# Altium PCB Crosstalk-1.PcbDoc
Units mil, origin at the board's own origin, x right, y up, seen from the top; angles counter-clockwise.
Board outline 3200 x 1570 mil, 2 copper layers (Top Layer, Bottom Layer); 9 components, 4 nets, 18 pads, 6 vias.
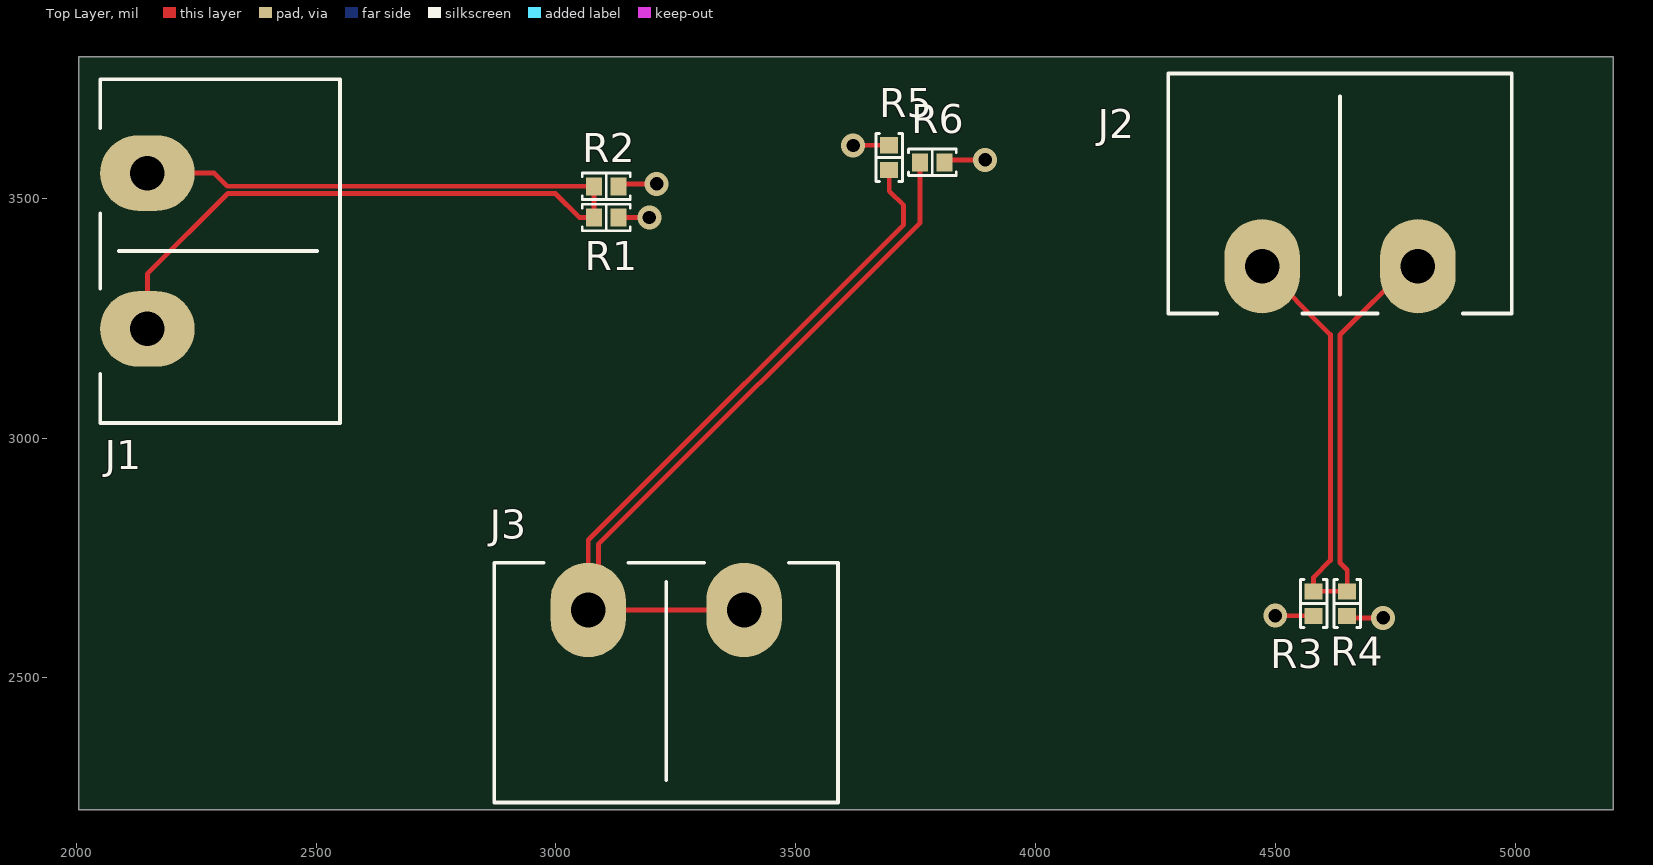
[diagram p0: Top Layer view]
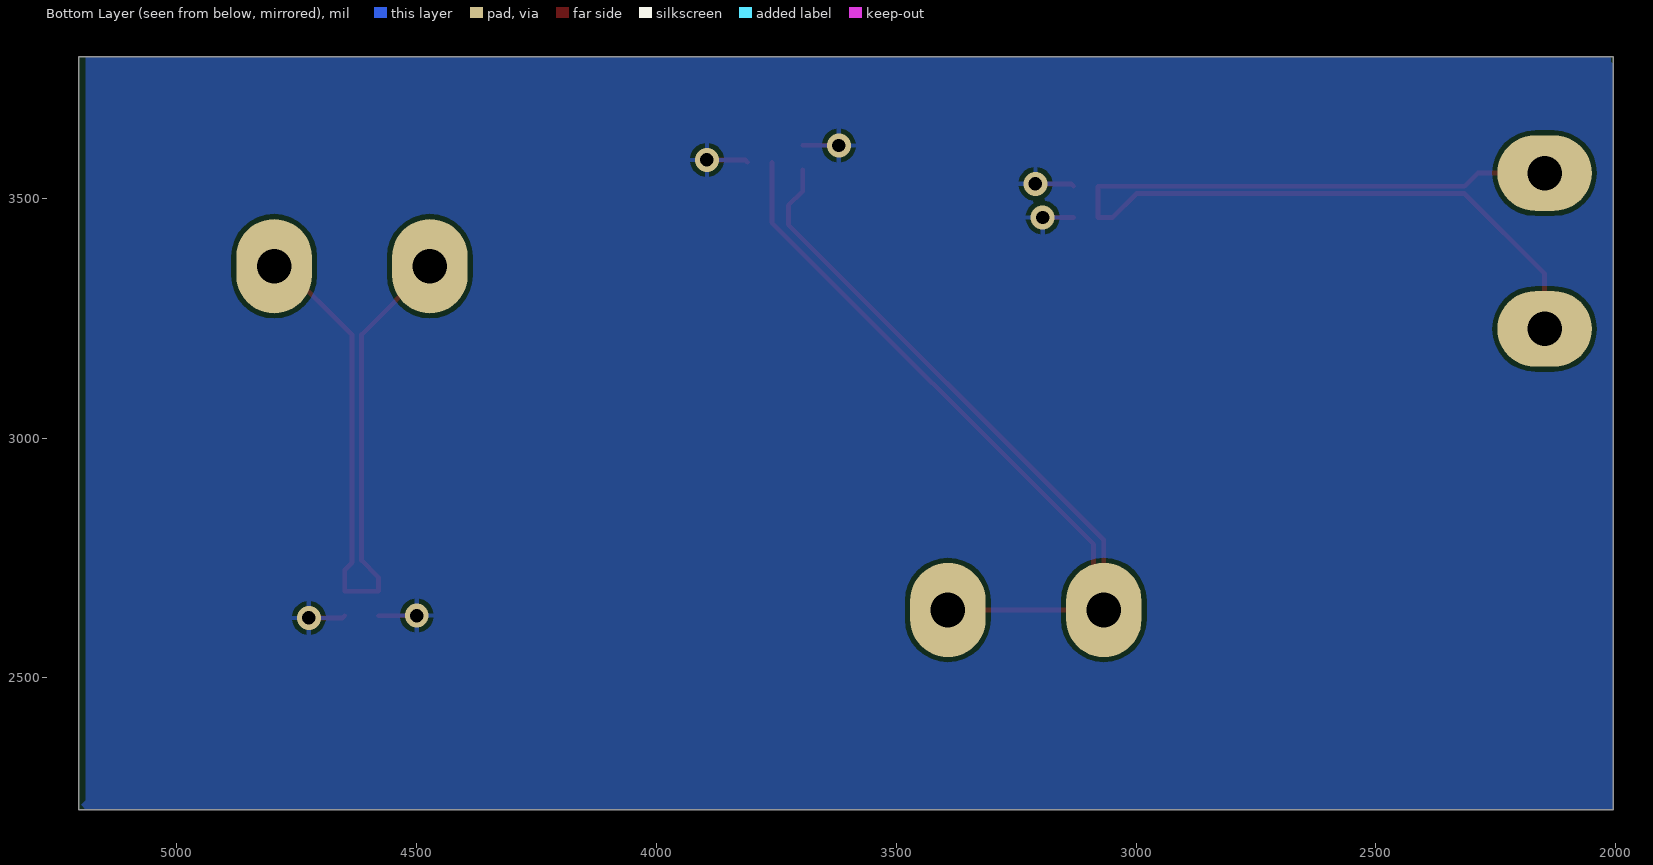
[diagram p1: Bottom Layer view, seen from below]
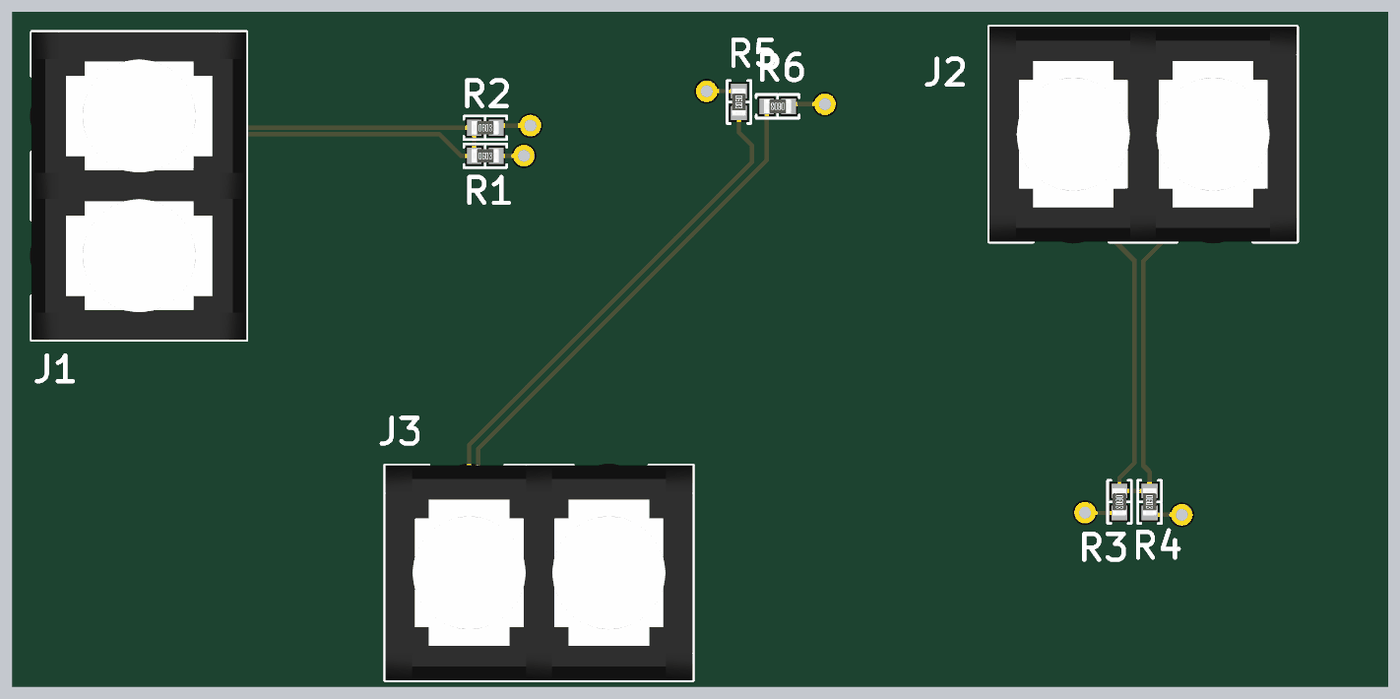
[diagram p2: 3D render of the assembled board from above, using the file's embedded part models]

## Layer stack, top to bottom
Top Solder: solder mask 0.4, Solder Resist, Dk 3.5
Top Layer: signal copper 1.4
Dielectric 1: dielectric 12.6, FR-4, Dk 4.8
Bottom Layer: signal copper 1.4
Bottom Solder: solder mask 0.4, Solder Resist, Dk 3.5

## Board outline
2005,2225 2005,3795 5205,3795 5205,2225

## Design rules (kind name [scope] priority, off if disabled: settings)
Clearance [All] p1: gap=10 ignorepadtopadclearanceinfootprint=FALSE except(0: Arc-Hole Track-Hole SMDPad-Hole THPad-Hole Via-Hole Fill-Hole Poly-Hole Region-Hole Text-Hole)
PolygonConnect [All] p1: connectstyle=Relief reliefconductorwidth=10 reliefentries=4 polygonreliefangle="90 Angle" airgapwidth=10
RoutingVias [All] p1: holewidth=28 width=50 viastyle="Through Hole" minholewidth=28 minwidth=50 maxholewidth=28 maxwidth=50
SolderMaskExpansion [All] p1: expansion=4 istentingtop=FALSE
Width [All] p1: maxlimit=10 minlimit=10 preferedwidth=10
30 further rules are at their usual default settings.

## Components (designator, comment, footprint, x,y, rotation, side; value= is the part's Value field where it differs from the comment)
J1 "4DB-P108-02" "TE 4DB-P108-02" 2300,3390 r270 top
J2 "4DB-P108-02" "TE 4DB-P108-02" 4635,3510 r0 top
J3 "4DB-P108-02" "TE 4DB-P108-02" 3230,2490 r180 top
R1 "1 kOhms" "RES 0603_1608" 3105,3460 r0 top
R2 "1 kOhms" "RES 0603_1608" 3105,3525 r0 top
R3 "1 kOhms" "RES 0603_1608" 4580,2655 r270 top
R4 "1 kOhms" "RES 0603_1608" 4650,2655 r270 top
R5 "1 kOhms" "RES 0603_1608" 3695,3585 r270 top
R6 "1 kOhms" "RES 0603_1608" 3785,3575 r180 top

## Footprints (in the part's own frame and the unit in brackets; to place one, negate y for a bottom-side part, rotate by r counter-clockwise, add the part's x,y. Pads: shape width x height; smd on the part's side, far side on the other; paste and mask are expansions set on the pad)
"RES 0603_1608" [mm] "Chip Resistor, 2-Leads, Body 1.60x0.80mm, IPC Medium Density"
  rect 0.85x0.95 smd: 1(-0.65,0) 2(0.65,0)
  silkscreen extent -1.27,-0.7 1.27,0.7, body extent -0.8,-0.4 0.8,0.4, height 0.45
"TE 4DB-P108-02" [mm] "Assembly, Dual Barrier 4DB P108"
  oval 4x5 hole 1.829: 1(-4.127,-3.85) 2(4.128,-3.85)
  silkscreen extent -9.1,-6.35 9.1,6.35, body extent -9.08,-6.35 9.08,6.35, height 14.48

## Part data
J1 J2 J3: "CONN BARRIER STRIP 2CIRC 0.325\"", Color=Black, Current Rating (Amps)=20A, Manufacturer="TE Connectivity AMP Connectors", Supplier Part Number 1=A98472-ND, Voltage Rating=150V, Barrier Type="2 Wall (Dual)", Bottom Termination="PC Pin", ComponentLink1Description=Datasheet, ComponentLink1URL=https://www.te.com/commerce/DocumentDelivery/DDEController?Action=srchrtrv&DocNm=2-1437667-4&DocType=Customer+Drawing&DocLang=English, ComponentLink2Description="DigiKey Link", ComponentLink2URL=http://digikey.com/product-detail/en/te-connectivity-amp-connectors/4DB-P108-02/A98472-ND/1277921, lastupdated="15/01/2020 04:14:08", Lifecycle Status=Active, Minimum Order=1, Number of Circuits=2, Number of Rows=1, Number of Wire Entries=2, Packaging=Bulk, Part Number=4DB-P108-02, Part Status=Active, Pitch="0.325\" (8.26mm)", price=1.04, series="4DB, Buchanan", Supplier 1=DigiKey, Terminal Block Type="Barrier Block", Top Termination="Screws with Captive Plate", Wire Gauge="12-22 AWG"
R1 R2 R3 R4 R5 R6: library part CPF0603B1K0E, "RES SMD 1K OHM 0.1% 1/16W 0603", Device Package="0603 (1608 Metric)", Manufacturer="TE Connectivity Passive Product", Operating Temperature="-55°C ~ 155°C", Power (Watts)="0.063W, 1/16W", Supplier Device Package=0603, Supplier Part Number 1=A119887CT-ND, Temperature Coefficient=±25ppm/°C, Tolerance=±0.1%, ComponentLink1Description=Datasheet, ComponentLink1URL=https://www.te.com/commerce/DocumentDelivery/DDEController?Action=srchrtrv&DocNm=1773200&DocType=DS&DocLang=English, ComponentLink2Description="DigiKey Link", ComponentLink2URL=https://www.digikey.com/en/products/detail/te-connectivity-passive-product/CPF0603B1K0E/2390473, Composition="Thin Film", Height - Seated (Max)="0.022\" (0.55mm)", lastupdated="18/10/2023 19:36:15", Lifecycle Status=Active, Minimum Order=1, Number of Terminations=2, Package / Case="0603 (1608 Metric)", Packaging=TapeAndReel, Part Number=CPF0603B1K0E, Part Status=Active, partid=4877, price=0.09, Resistance="1 kOhms", series="CPF, Neohm", Size / Dimension="0.061\" L x 0.031\" W (1.55mm x 0.80mm)", Supplier 1=DigiKey

## Via types
v1: diameter 50, hole 28, Top Layer to Bottom Layer, 6 vias

## Nets (pads, with @x,y where several pads share a name; then routed paths per layer and width w, separated by ;. In a path a pad name is that pad's centre, name@x,y a point inside that pad or via, vN(x,y) a via of type N, cw(c..) or ccw(c..) an arc to the next point about the centre after c; other vN are vias at no path point)
DIAG(45): J3.1 J3.2 R5.2 R6.2 | length 2747.6
  Top Layer w10: J3.1 J3.2 ; R5.2 3695,3515 3725,3485 3725,3445 3067.5,2787.5 J3.2 ; R6.2 3759.41,3449.41 3088.86,2778.86 3088.86,2662.93 J3.2
GND: R1.2 R2.2 R3.2 R4.2 R5.1 R6.1 | length 454.4
  Top Layer w10: R1.2 v1(3195,3460) ; R2.2 3135.59,3530 v1(3210,3530) ; v1@3620,3610.59 R5.1 ; R6.1 3815.59,3580 v1(3895,3580) ; v1(4500,2630) 4500.59,2629.41 R3.2 ; R4.2 4654.41,2625 v1@4715,2625
  other v1: 4725,2625 3620,3610
HORIZ: J1.1 J1.2 R1.1 R2.1 | length 2143.5
  Top Layer w10: J1.2 2148.43,3342.57 2315.86,3510 2999.14,3510 3049.14,3460 R1.1 R2.1 2315,3525 2287.5,3552.5 J1.1
VERT: J2.1 J2.2 R3.1 R4.1 | length 1583.9
  Top Layer w10: J2.1 4615,3215.93 4615,2745 4580,2710 R3.1 R4.1 4650,2725 4635,2740 4635,3215 4778.43,3358.43 J2.2

## Polygon pours and split planes (outlines as drawn)
GND on Bottom Layer "GND_L02_P000" (solid, pour order 0): 2010,3800 2015,3795 5190,3795 5190,2245 5200,2235 5190,2225 2005,2225 2005,3780 2010,3785